# Altium PCB SPI-4B触摸.PCBDOC
Units mm, origin at the board's own origin, x right, y up, seen from the top; angles counter-clockwise.
Board outline 63.63 x 54.48 mm, 2 copper layers (Top Layer, Bottom Layer); 19 components, 31 nets, 65 pads, 20 vias.
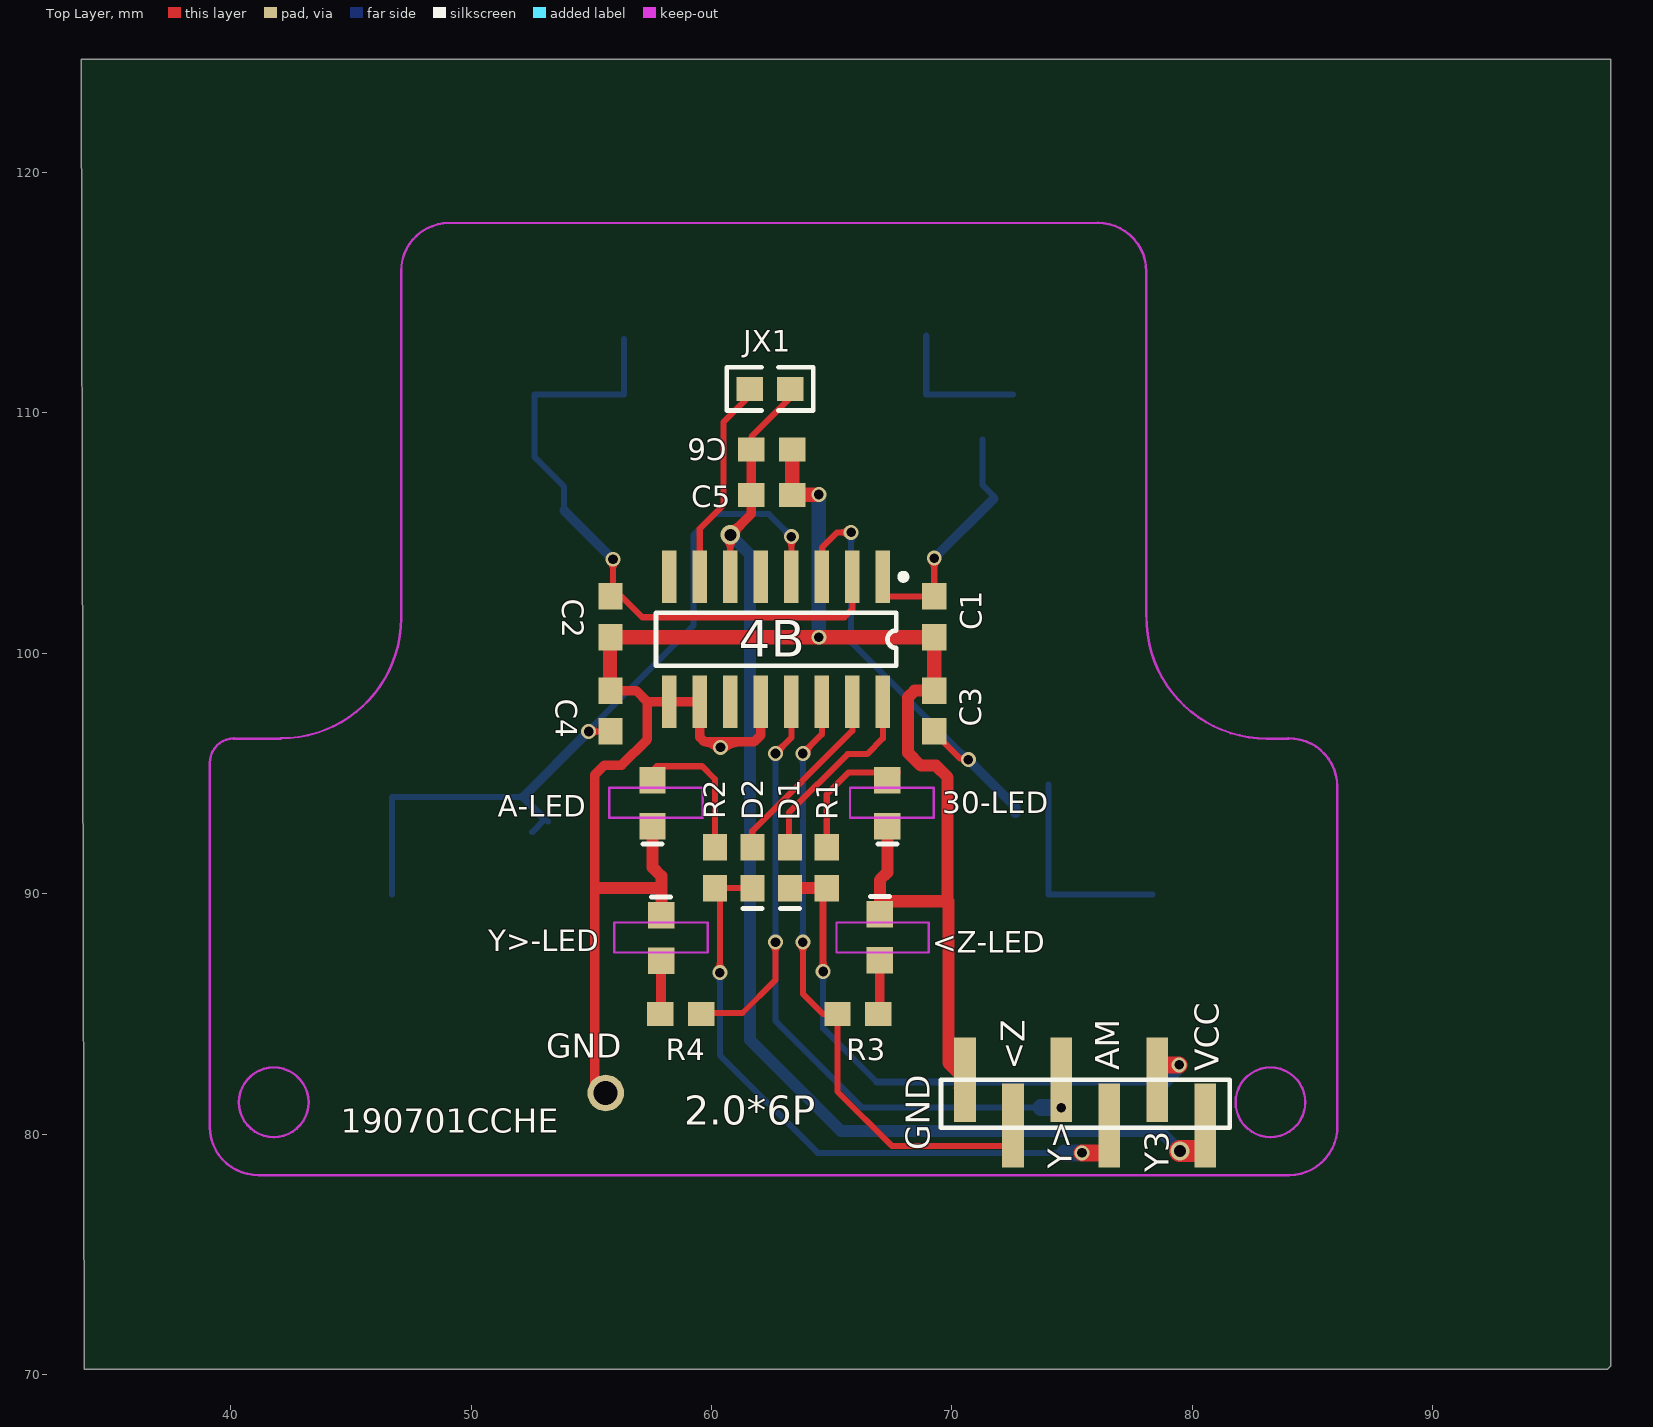
[diagram p0: Top Layer view]
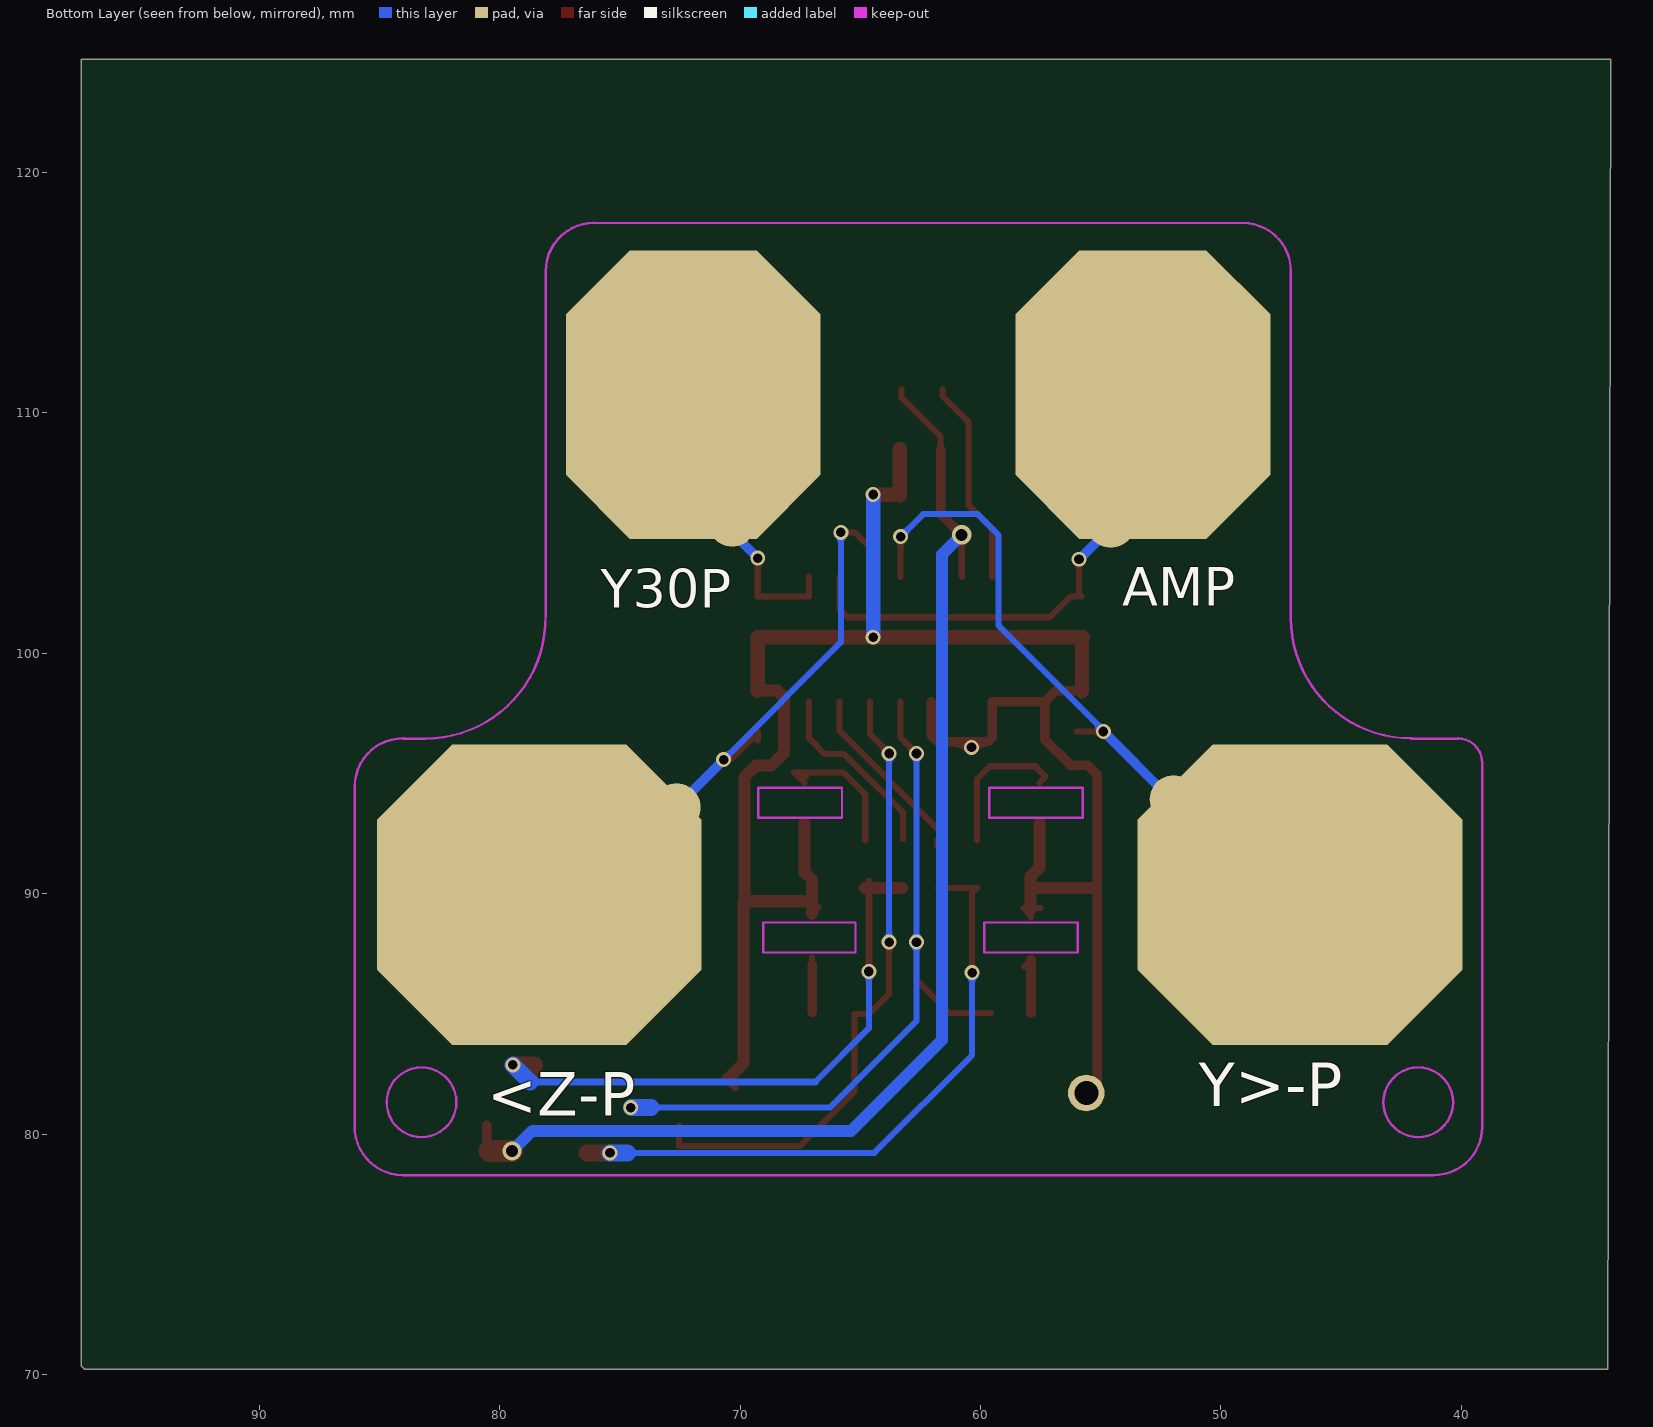
[diagram p1: Bottom Layer view, seen from below]

## Layer stack, top to bottom
Top Layer: signal copper 0.0356
Dielectric: dielectric 0.32, FR-4, Dk 4.8
Bottom Layer: signal copper 0.0356

## Board outline
33.782,124.714 97.409,124.714 97.409,70.358 97.282,70.231 33.909,70.231

## Design rules (kind name [scope] priority, off if disabled: settings)
Clearance [All] p1: gap=0.254
PolygonConnect [All] p1: connectstyle=Relief reliefconductorwidth=0.254 reliefentries=4 polygonreliefangle="90 Angle"
RoutingVias [All] p1: holewidth=0.4 width=0.62 viastyle="Through Hole" minholewidth=0.4 minwidth=0.6 maxholewidth=0.5 maxwidth=1
SilkscreenOverComponentPads [All] p1: minsilkscreentomaskgap=0.254
SolderMaskExpansion [All] p1: expansion=0.102
Width [InNet('GND')] p1: maxlimit=1 minlimit=0.254 preferedwidth=0.5 toplayer_prefwidth=0.4 minimp=50.000000 maximp=50.000000 favimp=50.000000
27 further rules are at their usual default settings.

## Components (designator, comment, footprint, x,y, rotation, side; value= is the part's Value field where it differs from the comment)
2.0*6P "PH2.0*6" MHDR1X7 76.164,81.264 r180 top locked
4B "" SO-G16 62.687,100.584 r180 top locked
30-LED "CS-LED" CC1608-0603#1 67.315,93.764 r90 top (schematic designator LED2)
<Z-LED "BS-LED" CC1608-0603#1 67.005,88.189 r270 top locked (schematic designator LED4)
A-LED "CS-LED" CC1608-0603#1 57.547,93.764 r90 top locked (schematic designator LED1)
C1 "22P" CR1608-0603 69.266,101.517 r270 top locked (schematic designator C2)
C2 "22P" CR1608-0603 55.8,101.517 r270 top locked (schematic designator C1)
C3 "22P" CR1608-0603 69.266,97.6 r90 top locked (schematic designator C2)
C4 "22P" CR1608-0603 55.8,97.6 r90 top locked (schematic designator C1)
C5 "1uf" CR1608-0603 62.509,106.578 r180 top locked (schematic designator C4)
C6 "0.01uf" CR1608-0603 62.509,108.483 r0 top locked (schematic designator C4)
D1 "SS14" CC1608-0603#2 63.271,91.084 r90 top locked (schematic designator R2)
D2 "SS14" CC1608-0603#2 61.7,91.084 r90 top locked (schematic designator R1)
JX1 "" C1608-0603 62.433,111 r180 top locked (schematic designator R1)
R1 "4.7K" CR1608-0603 64.795,91.084 r90 top locked
R2 "4.7K" CR1608-0603 60.15,91.084 r90 top locked
R3 "4.7K" CR1608-0603 66.091,85 r0 top locked (schematic designator R1)
R4 "4.7K" CR1608-0603 58.725,85 r180 top locked (schematic designator R2)
Y>-LED "BS-LED" CC1608-0603#1 57.903,88.164 r270 top locked (schematic designator LED3)

## Footprints (in the part's own frame and the unit in brackets; to place one, negate y for a bottom-side part, rotate by r counter-clockwise, add the part's x,y. Pads: shape width x height; smd on the part's side, far side on the other; paste and mask are expansions set on the pad)
C1608-0603 [mm] "Chip Resistor;"
  rect 1.1x1 smd: 1(-0.85,0) 2(0.85,0)
  silkscreen extent -1.8,-0.9 1.8,0.9
CC1608-0603#1 [mm] "Chip Capacito"
  rect 1.1x1.1 smd: 1(-0.95,0) 2(0.95,0)
  silkscreen extent -1.7,-0.4 -1.7,0.4
CC1608-0603#2 [mm]
  rect 1.1x1 smd: 1(-0.85,0) 2(0.85,0)
  silkscreen extent -1.7,-0.4 -1.7,0.4
CR1608-0603 [mm]
  rect 1.1x1 smd: 1(-0.85,0) 2(0.85,0)
MHDR1X7 [mm] "Connector; Header; 7 Position"
  rect 0.9x3.5 smd: 1(-4.38,0.905) 2(-2.38,-1) 3(-0.38,0.905) 4(1.62,-1) 5(3.62,0.905) 6(5.62,-1)
  silkscreen extent -5.39,-1 6.62,1
SO-G16 [mm] "Small Outline; 16 Leads; Body Width 3.9 mm; Pitch 1.27 mm"
  rect 0.6x2.2 smd: 1(-4.445,-2.6) 2(-3.175,-2.6) 3(-1.905,-2.6) 4(-0.635,-2.6) 5(0.635,-2.6) 6(1.905,-2.6) 7(3.175,-2.6) 8(4.445,-2.6) 9(4.445,2.6) 10(3.175,2.6) 11(1.905,2.6) 12(0.635,2.6) 13(-0.635,2.6) 14(-1.905,2.6) 15(-3.175,2.6) 16(-4.445,2.6)
  silkscreen extent -5.42,-2.72 5,1.1

## Part data
30-LED <Z-LED A-LED Y>-LED: library part LED3, "Typ"

## Free pads (board coordinates)
  oct 13.5x12.5 smd far side: 0(46.711,89.964) 0(78.347,89.964)
  oct 10.6x12 smd far side: 0(53.247,110.764) 0(71.947,110.764)
  round 2 smd far side: 1(51.968,93.929) 1(72.644,93.599) 2(54.585,105.385) 2(70.333,105.435)
  round 1.524 hole 1: 1(55.601,81.712)

## Via types
v1: diameter 0.62, hole 0.4, Top Layer to Bottom Layer, 18 vias
v2: diameter 0.8, hole 0.5, Top Layer to Bottom Layer, 2 vias

## Nets (pads, with @x,y where several pads share a name; then routed paths per layer and width w, separated by ;. In a path a pad name is that pad's centre, name@x,y a point inside that pad or via, vN(x,y) a via of type N, cw(c..) or ccw(c..) an arc to the next point about the centre after c; other vN are vias at no path point)
30Y: 2.0*6P.2 D1.1 R1.1 | length 26.5
  Top Layer w0.254: 2.0*6P.2 2.0*6P.2@78.544,82.855
  Top Layer w0.3: v1@64.53,86.88 ccw(c64.257,87.153) 64.643,87.153 ccw(c65.029,87.153) v1@64.756,86.88 ; v1(64.643,86.766) R1.1@64.643,90.514
  Top Layer w0.5: D1.1 R1.1
  Top Layer w0.7: 2.0*6P.2@78.555,82.88 v1(79.451,82.88)
  Bottom Layer w0.254: v1@64.514,86.637 cw(c64.201,86.325) 64.643,86.325 cw(c65.085,86.325) v1@64.772,86.637 ; v1@64.821,86.741 64.643,86.563 64.643,84.404 66.878,82.169
  Bottom Layer w0.3: 66.878,82.169 78.74,82.169
  Bottom Layer w0.7: 78.74,82.169 v1(79.451,82.88)
30Y-R: 30-LED.2 R1.2 | length 6.2
  Top Layer w0.254: R1.2@64.795,92.214 64.795,94.132 65.71,95.047 67.748,95.047 30-LED.2@67.315,94.614 ; 30-LED.2@67.265,94.889 30-LED.2@67.589,94.889
<Z: 2.0*6P.5 4B.14 R3.1 | length 29.4
  Top Layer w0.254: v1@63.671,87.856 cw(c63.358,87.544) 63.8,87.544 cw(c64.242,87.544) v1@63.929,87.856 ; v1(63.8,87.986) 63.8,85.831 64.631,85 R3.1 65.241,81.774 67.513,79.502 72.544,79.502 2.0*6P.5 ; v1(63.8,95.834) 64.592,96.626 4B.14 ; v1@63.8,96.017 ccw(c63.8,96.459) 64.112,96.147 ccw(c64.425,95.834) v1@63.983,95.834
  Bottom Layer w0.254: v1@63.671,88.115 ccw(c63.358,88.427) 63.8,88.427 ccw(c64.242,88.427) v1@63.929,88.115 ; v1@63.671,95.705 cw(c63.358,95.392) 63.8,95.392 cw(c64.242,95.392) v1@63.929,95.705 ; v1(63.8,87.986) v1(63.8,95.834)
<Z-P: 4B.3 C3.1 pad.0@78.347,89.964 pad.1@72.644,93.599 | length 30.6
  Top Layer w0.254: 4B.3 64.592,104.394 65.227,105.029 v1(65.811,105.029) ; v1@65.682,104.9 ccw(c65.37,104.587) 65.37,105.029 ccw(c65.37,105.471) v1@65.682,105.158 ; C3.1@69.266,96.368 C3.1 ; C3.1@69.494,96.469 70.333,95.631 ; 70.369,95.631 ccw(c70.369,95.899) v1@70.559,95.71 ; v1@70.52,95.508 ccw(c70.333,95.427) 70.333,95.631 ; v1@70.688,95.631 70.333,95.631
  Bottom Layer w0.254: v1@65.682,104.9 cw(c65.37,104.587) 65.811,104.587 cw(c66.253,104.587) v1@65.941,104.9 ; v1(65.811,105.029) 65.811,100.457 v1(70.688,95.58) ; v1@70.505,95.58 ccw(c70.063,95.58) 70.376,95.893 ccw(c70.688,96.205) v1@70.688,95.763 ; pad.0@74.016,94.539 74.016,89.964 pad.0@78.347,89.964
  Bottom Layer w0.4: v1@70.663,95.58 72.644,93.599 pad.1@72.644,93.345
>1-1: <Z-LED.2 R3.2 | length 2.4
  Top Layer w0.254: R3.2 R3.2@67.005,85.064 ; <Z-LED.2@66.954,86.995 67.005,87.046 <Z-LED.2@67.005,87.339
  Top Layer w0.4: R3.2@67.005,85.064 <Z-LED.2@67.005,87.046
>2-1: R4.2 Y>-LED.2 | length 2.7
  Top Layer w0.254: R4.2@57.875,85.014 R4.2@57.903,85.042 ; Y>-LED.2@57.903,87.314 57.903,87.258 Y>-LED.2@58.191,86.97
  Top Layer w0.4: R4.2@57.903,85.042 Y>-LED.2@57.903,87.258
AHLB: 4B.5
AM: 2.0*6P.3 D2.1 R2.1 | length 27.8
  Top Layer w0.254: v1@60.221,86.845 ccw(c59.909,87.157) 60.35,87.157 ccw(c60.792,87.157) v1@60.48,86.845 ; v1(60.35,86.716) 60.35,90.034 R2.1 D2.1 D2.1@61.773,90.234
  Top Layer w0.7: v1(75.413,79.223) 2.0*6P.3@76.378,79.223
  Bottom Layer w0.254: v1@60.221,86.586 cw(c59.909,86.274) 60.35,86.274 cw(c60.792,86.274) v1@60.48,86.586 ; v1(60.35,86.716) 60.35,83.287 64.414,79.223 67.164,79.223 74.676,79.223
  Bottom Layer w0.7: 74.676,79.223 v1(75.413,79.223)
AM-P: 4B.2 C2.1 pad.0@53.247,110.764 pad.2@54.585,105.385 | length 28.2
  Top Layer w0.254: v1@55.776,103.782 cw(c55.464,103.47) 55.905,103.47 cw(c56.347,103.47) v1@56.035,103.782 ; C2.1 55.905,102.473 v1(55.905,103.911) ; C2.1@56.007,102.367 56.256,102.367 57.125,101.498 65.532,101.498 65.862,101.829 4B.2
  Bottom Layer w0.254: pad.2@53.873,105.943 53.873,106.934 52.647,108.161 52.647,110.764 56.363,110.764 pad.0@56.363,113.081
  Bottom Layer w0.4: pad.2@53.873,105.943 v1(55.905,103.911)
AM-R: A-LED.2 R2.2 | length 6.2
  Top Layer w0.254: A-LED.2@57.547,94.614 57.291,94.869 57.723,95.301 58.344,95.301 59.614,95.301 60.147,94.767 R2.2@60.147,92.214
D1: 
D2: 
GND: 2.0*6P.6 4B.9 4B.10 4B.12 30-LED.1 <Z-LED.1 A-LED.1 C1.2 C2.2 C3.2 C4.2 C5.1 C6.2 pad.1@55.601,81.712 Y>-LED.1 | length 91.8
  Top Layer w0.254: Y>-LED.1@57.506,89.408 58.217,89.408 57.903,89.094 57.903,89.014 57.903,89.334 Y>-LED.1@57.912,89.343 ; C5.1 C5.1@63.385,106.604 ; 2.0*6P.6@70.195,81.915 2.0*6P.6 ; <Z-LED.1@66.751,89.433 67.005,89.687 67.005,89.039 67.005,89.179 <Z-LED.1@66.751,89.433
  Top Layer w0.4: pad.1@55.601,81.712 55.143,82.169 55.143,94.945 55.55,95.352 56.261,95.352 57.332,96.423 57.332,97.984 4B.9 ; C4.2@55.753,98.45 56.871,98.45 57.337,97.984 4B.9 ; v1@60.288,96.025 ccw(c59.715,95.609) 59.715,96.317 ; v1@60.455,96.012 cw(c61.191,95.276) 61.191,96.317 ; 4B.12 62.052,96.603 61.766,96.317 59.715,96.317 ; 4B.9 4B.10 59.512,96.52 59.715,96.317
  Top Layer w0.5: 55.194,90.246 57.912,90.246 ; A-LED.1@57.547,92.914 57.547,92.028 57.547,91.094 57.912,90.729 Y>-LED.1@57.912,89.343 ; <Z-LED.1@67.005,89.179 67.005,90.576 67.315,90.886 67.315,92.022 30-LED.1@67.315,92.914 ; <Z-LED.1@67.005,89.687 69.85,89.687 69.85,82.957 2.0*6P.6 ; C3.2 68.453,98.45 68.174,98.171 68.174,95.86 68.707,95.326 69.342,95.326 69.825,94.844 69.825,89.687
  Top Layer w0.6: C2.2@55.753,100.667 C1.2 C3.2 ; C4.2@55.778,98.425 C2.2@55.778,100.642 ; C5.1 C6.2 ; C5.1@63.385,106.604 v1(64.465,106.604)
  Bottom Layer w0.6: v1(64.465,100.667) v1(64.465,106.604)
  other v1: 60.377,96.09
LPMB: 4B.8
MOTO: 
OD: 4B.11
OUT1: 4B.16 D1.2 | length 7.8
  Top Layer w0.254: D1.2@63.221,92.278 63.221,93.37 65.659,95.809 66.472,95.809 67.132,96.469 4B.16
OUT2: 4B.15 D2.2 | length 7.9
  Top Layer w0.254: D2.2@61.697,91.999 61.697,92.608 65.862,96.774 4B.15 ; D2.2@61.798,91.999 D2.2@61.798,92.227
OUT3: 
OUT4: 
SM: 
TCH1: 
TCH2: 
TCH3: 
TCH4: 
TOG: 4B.7 JX1.2 | length 8.7
  Top Layer w0.254: 4B.7 59.512,105.181 60.503,106.172 60.503,109.626 61.583,110.707 JX1.2
VC2: 
VCC: 2.0*6P.1 4B.6 C5.2 C6.1 JX1.1 | length 53.8
  Top Layer w0.254: v2@60.589,104.734 cw(c60.123,104.268) 60.782,104.268 cw(c61.441,104.268) v2@60.975,104.734 ; 4B.6 v2(60.782,104.927) ; C6.1 61.659,109.005 63.283,110.629 JX1.1 ; v2@79.426,79.299 v2(79.484,79.299)
  Top Layer w0.4: v2(60.782,104.927) 61.659,105.805 C5.2 C6.1 ; v2@60.782,105.127 ccw(c60.782,105.61) 61.124,105.269 ccw(c61.465,104.927) v2@60.982,104.927 ; 2.0*6P.1@80.395,79.328 80.544,79.477 2.0*6P.1
  Top Layer w0.9: v2(79.484,79.299) 2.0*6P.1@80.423,79.299
  Bottom Layer w0.5: v2(60.782,104.927) 61.595,104.115 61.595,83.922 65.38,80.137 78.645,80.137 v2@79.455,79.328
Y30-P: 4B.1 C1.1 pad.0@71.947,110.764 pad.2@70.333,105.435 | length 17.4
  Top Layer w0.254: 4B.1 67.132,102.367 C1.1 v1(69.266,103.962) ; v1@69.136,103.833 cw(c68.824,103.52) 69.266,103.52 cw(c69.708,103.52) v1@69.395,103.833
  Bottom Layer w0.254: pad.0@68.936,113.208 68.936,110.764 pad.0@72.547,110.764 ; pad.0@71.272,108.89 71.272,107.01 71.73,106.553 pad.0@71.73,106.426
  Bottom Layer w0.4: v1(69.266,103.962) pad.0@71.73,106.426
Y>: 2.0*6P.4 4B.13 R4.1 | length 35.6
  Top Layer w0.254: R4.1@59.575,85.039 61.29,85.039 62.662,86.411 v1(62.662,87.986) ; v1@62.532,87.856 cw(c62.22,87.544) 62.662,87.544 cw(c63.104,87.544) v1@62.791,87.856 ; v1(62.662,95.834) 63.322,96.495 4B.13 ; v1@62.662,96.017 ccw(c62.662,96.459) 62.974,96.147 ccw(c63.287,95.834) v1@62.845,95.834
  Bottom Layer w0.254: v1@62.532,87.856 cw(c62.22,87.544) 62.662,87.544 cw(c63.104,87.544) v1@62.791,87.856 ; v1@62.532,88.115 ccw(c62.22,88.427) 62.662,88.427 ccw(c63.104,88.427) v1@62.791,88.115 ; v1@62.532,95.705 cw(c62.22,95.392) 62.662,95.392 cw(c63.104,95.392) v1@62.791,95.705 ; v1(62.662,95.834) v1(62.662,87.986) 62.662,84.709 66.269,81.102 68.332,81.102 73.711,81.102
  Bottom Layer w0.7: 73.711,81.102 v1@74.524,81.102
  other v1: 74.549,81.102
Y>-P: 4B.4 C4.1 pad.0@46.711,89.964 pad.1@51.968,93.929 | length 43.3
  Top Layer w0.254: v1(54.891,96.75) C4.1 C4.1@56.007,96.75 ; v1@55.02,96.621 cw(c55.333,96.308) 55.333,96.75 cw(c55.333,97.192) v1@55.02,96.879 ; v1@63.193,104.722 cw(c62.88,104.409) 63.322,104.409 cw(c63.764,104.409) v1@63.452,104.722 ; 4B.4 v1(63.322,104.851)
  Bottom Layer w0.254: pad.0@46.711,89.964 46.711,94.031 pad.1@52.172,94.031 ; pad.0@52.547,92.564 53.093,93.11 52.997,93.205 pad.1@52.172,94.031 ; 54.492,96.402 cw(c54.891,96.003) v1@54.891,96.567 ; 54.614,96.524 ccw(c54.389,96.75) v1@54.708,96.75 ; v1@54.891,96.933 ccw(c54.891,97.252) 55.117,97.027 ; v1@55.074,96.75 cw(c55.638,96.75) 55.239,97.149 ; v1@63.139,104.851 ccw(c62.697,104.851) 63.01,105.164 ccw(c63.322,105.476) v1@63.322,105.034 ; v1(63.322,104.851) 62.382,105.791 60.122,105.791 59.258,104.927 59.258,101.168 52.108,94.018 52.959,93.167 53.2,93.002 pad.1@52.172,94.031
  Bottom Layer w0.4: pad.1@52.172,94.031 v1(54.891,96.75)

## Keep-outs
Keep-Out Layer:
  circle w0.1: c83.251,81.324 r1.45
  circle w0.1: c41.794,81.324 r1.45
  lines w0.1: 40.107,96.454 42.092,96.454 ; 40.137,96.46 ccw(c40.137,95.46) 39.137,95.442 39.137,80.297 ccw(c41.137,80.297) 41.173,78.297 65.253,78.297 ; 42.092,96.464 ccw(c42.092,101.464) 47.092,101.464 ; 47.092,101.515 47.092,115.899 cw(c49.092,115.899) 49.092,117.899 76.067,117.899 ; 65.253,78.283 64.872,78.297 84.032,78.297 ccw(c84.032,80.297) 86.031,80.333 86.032,94.46 ccw(c84.032,94.46) 83.996,96.459 ; 76.067,117.908 cw(c76.067,115.887) 78.087,115.887 78.087,101.54 ; 78.096,101.54 ccw(c83.095,101.456) 83.095,96.456 ; 83.095,96.454 83.996,96.454 ; 55.753,93.166 55.753,94.415 59.639,94.415 59.639,93.166 55.753,93.166 ; 55.956,87.554 59.842,87.554 59.842,88.803 55.956,88.803 55.956,87.554 ; 65.202,87.554 69.037,87.554 69.037,88.803 65.202,88.803 65.202,87.554 ; 65.761,93.166 69.24,93.166 69.24,94.415 65.761,94.415 65.761,93.166

## Silkscreen, mask and mechanical layers (free items; w line width, h text height)
Top Overlay:
  text "GND" at 53.137,83.185 h1
  text "<Z" at 73.025,82.677 h1 r90
  text "AM" at 76.962,82.652 h1 r90
  text "VCC" at 81.102,82.626 h1 r90
  text "190701CCHE" at 44.577,80.061 h1
  text "GND" at 69.088,79.324 h1 r90
  text "Y>" at 74.981,78.562 h1 r90
  text "Y3" at 79.019,78.41 h1 r90
Bottom Overlay:
  text "AMP" at 54.102,101.981 h1.6
  text "Y30P" at 75.794,101.905 h1.6
  text "Y>-P" at 50.927,81.153 h1.8
  text "<Z-P" at 80.518,80.772 h1.8

## Dimensions
76.067,117.899 to 84.032,78.297 on Top Overlay
86.031,80.333 to 39.137,80.297 on Top Overlay